# Altium PCB PPG_Board.PcbDoc
Units mm, origin at the board's own origin, x right, y up, seen from the top; angles counter-clockwise.
Board outline 25 x 19 mm, 4 copper layers (Top Layer, Int1 (GND), Int2 (PWR), Bottom Layer), stack 1.334 mm thick; 43 components, 21 nets, 148 pads, 77 vias.
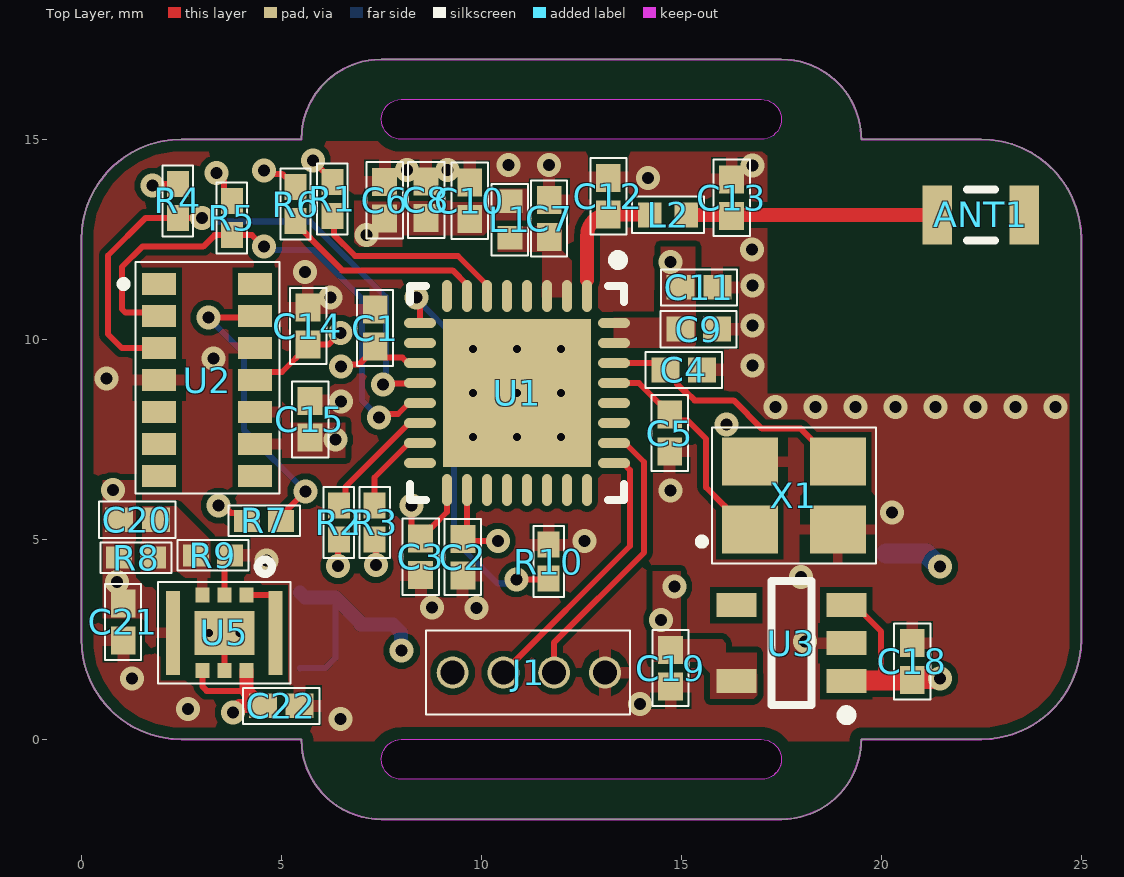
[diagram p0: Top Layer view]
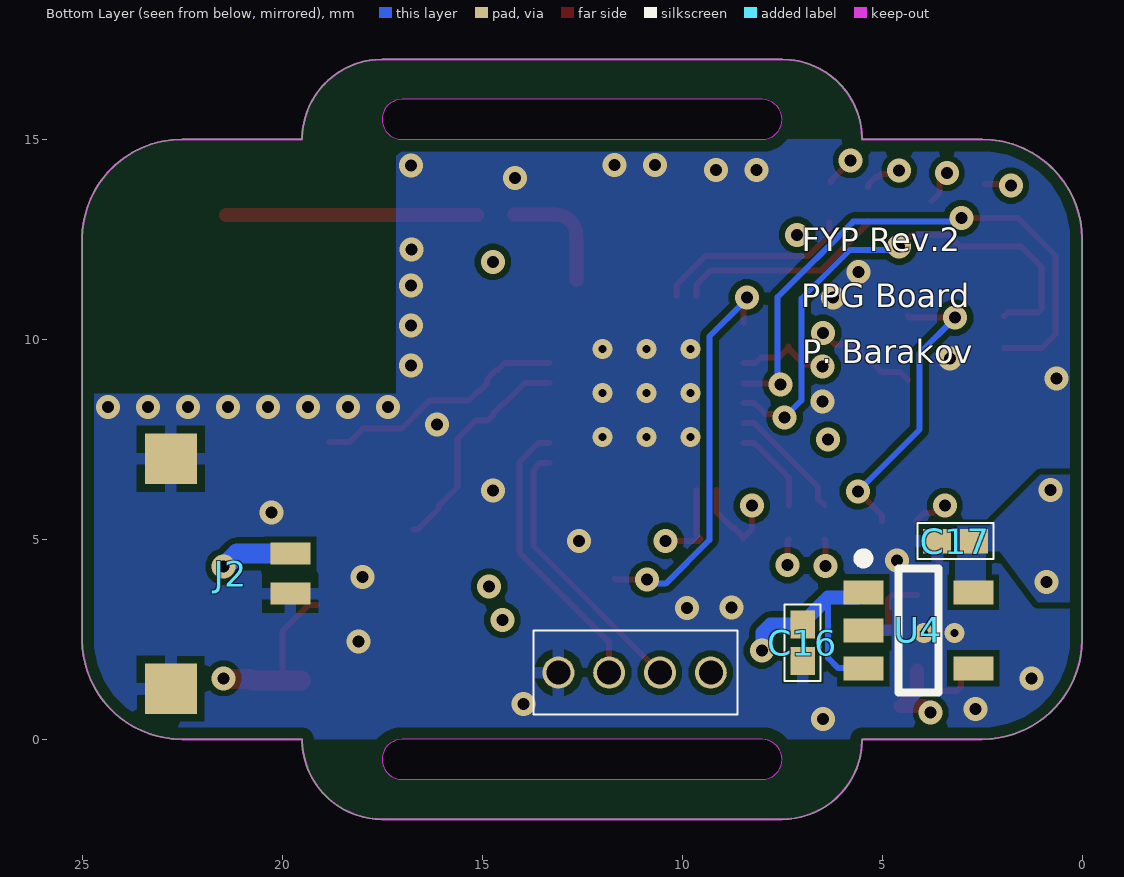
[diagram p1: Bottom Layer view, seen from below]
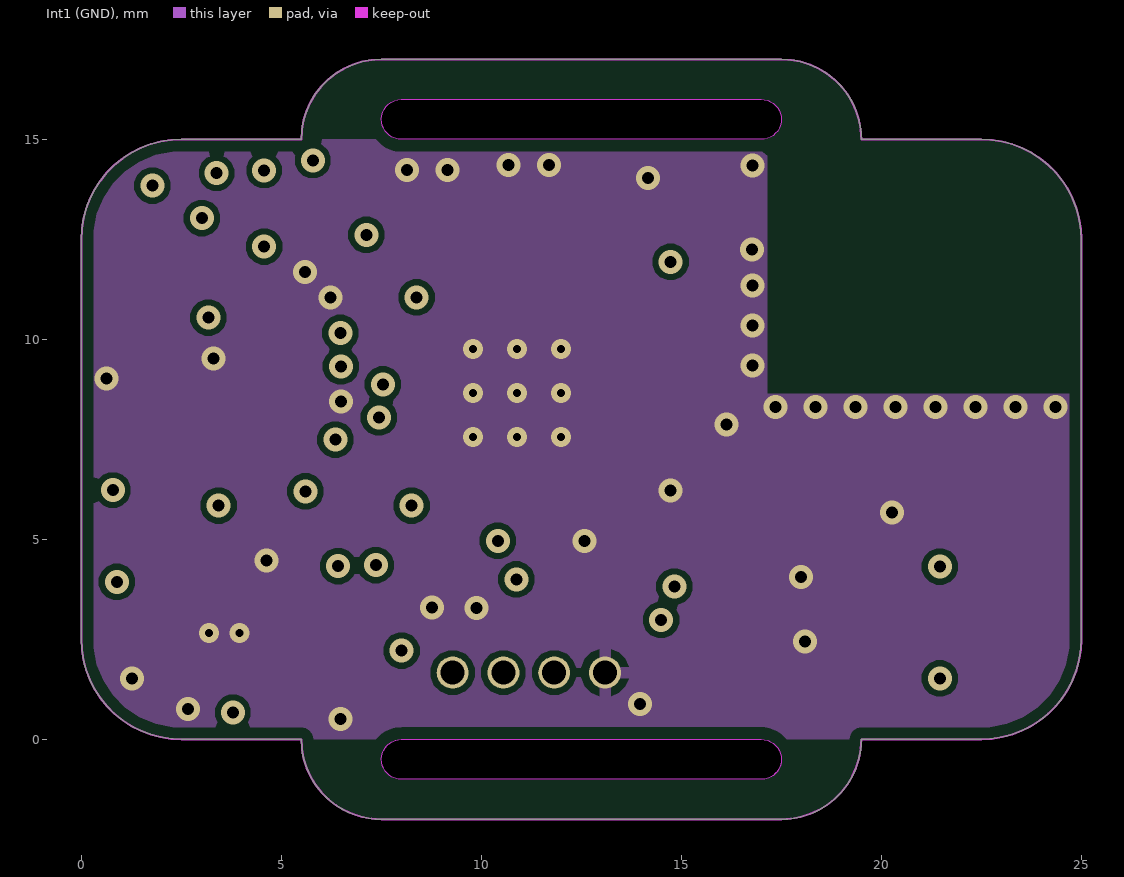
[diagram p2: Int1 (GND)]
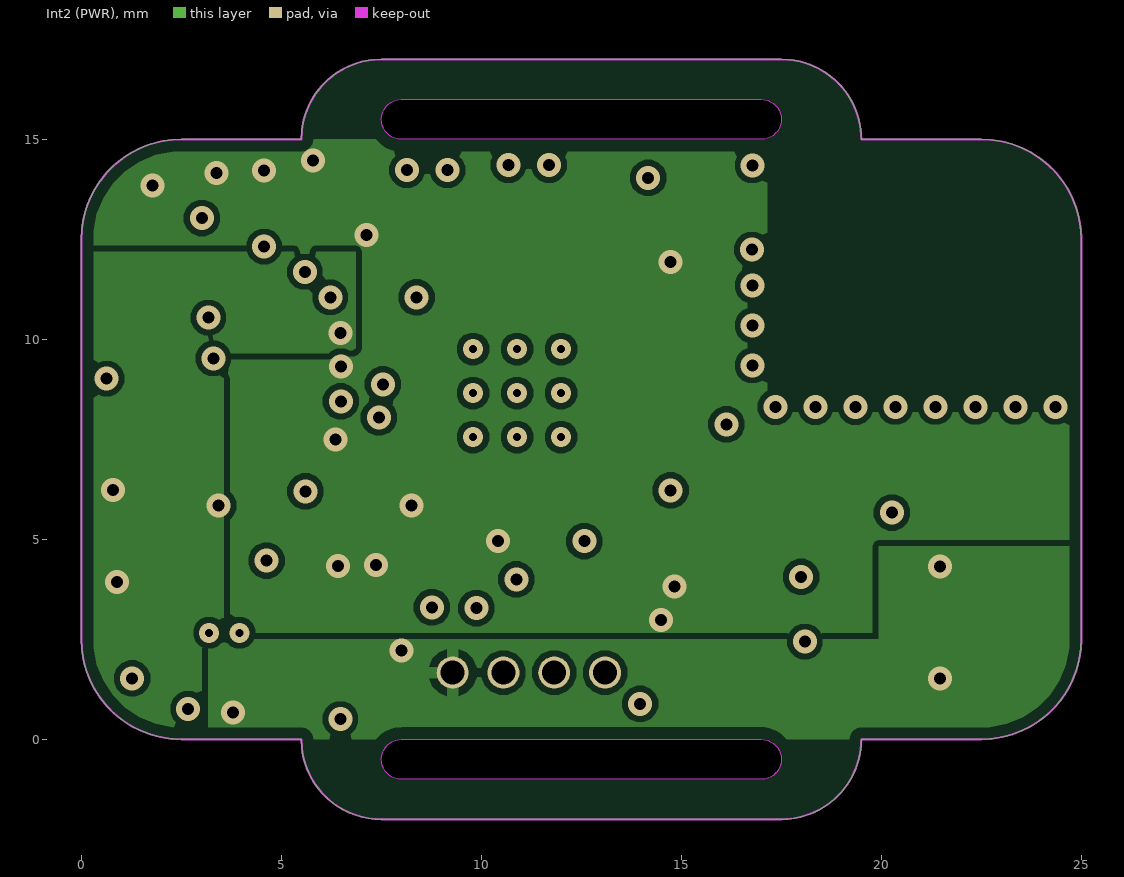
[diagram p3: Int2 (PWR)]
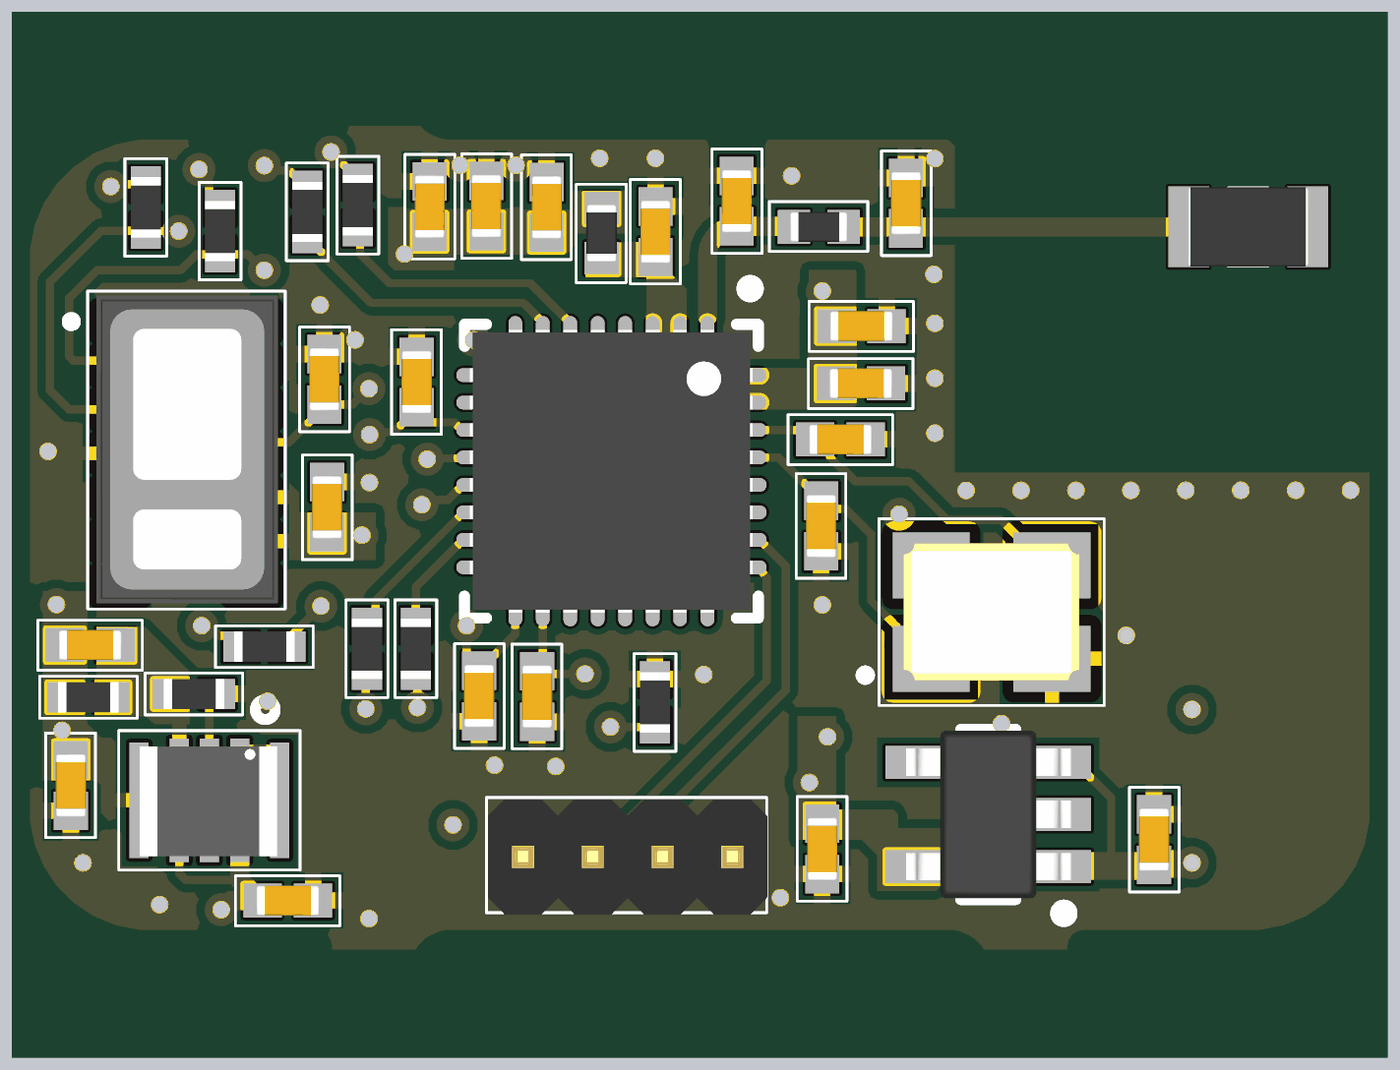
[diagram p4: 3D render of the assembled board from above, using the file's embedded part models]
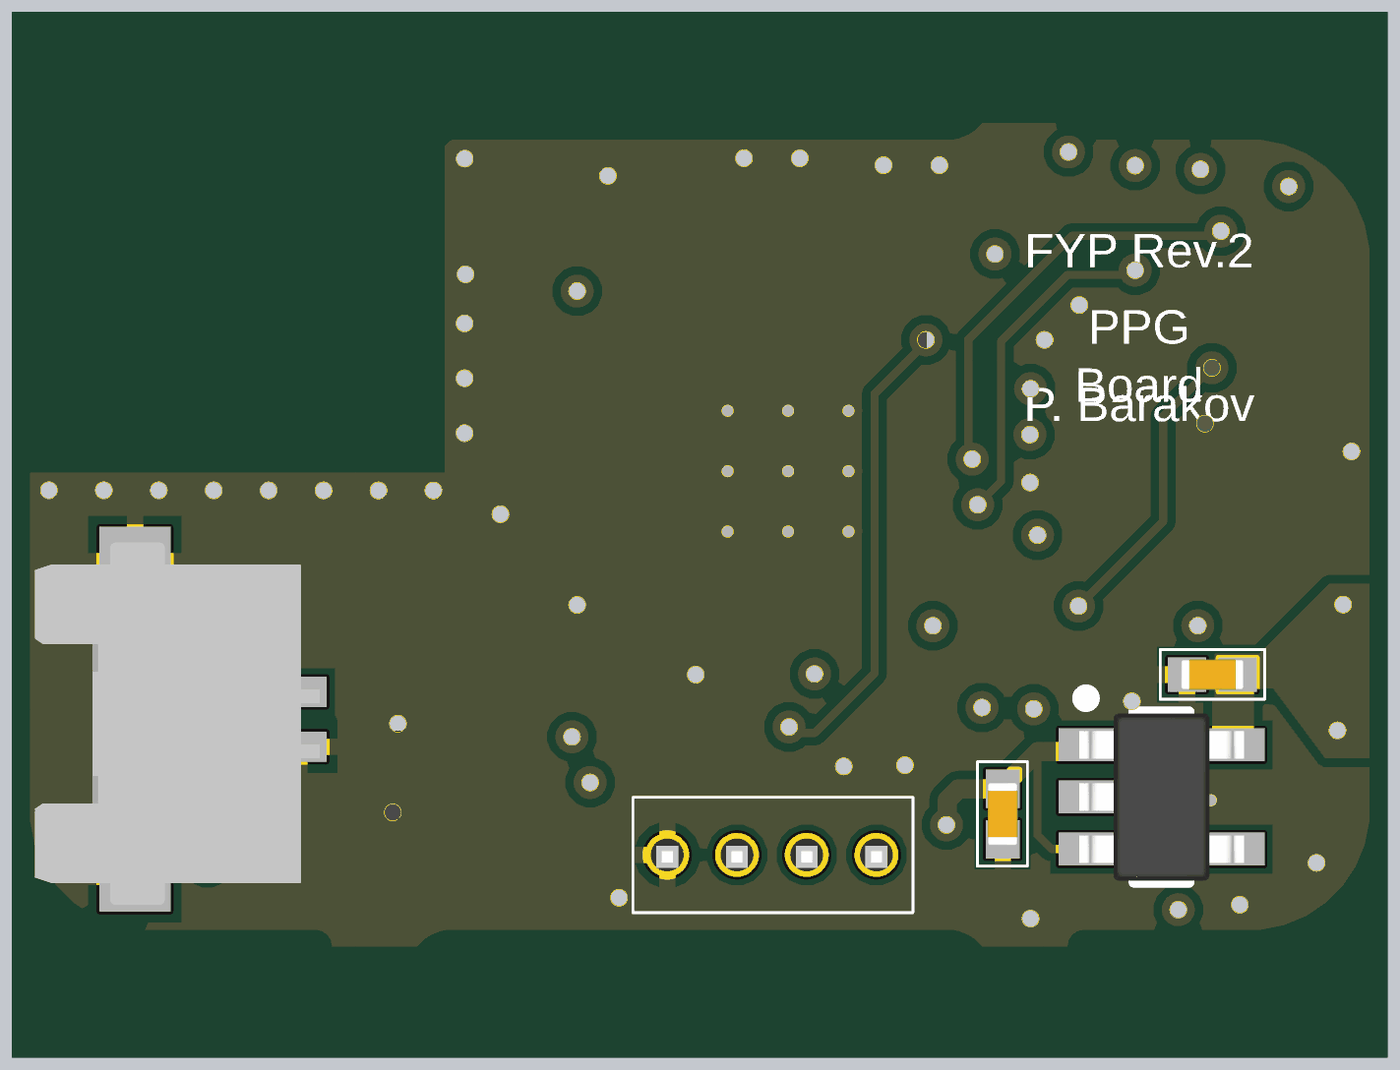
[diagram p5: 3D render of the assembled board from below, using the file's embedded part models]

## Layer stack, top to bottom
Top Solder: solder mask 0.0254, SM-001, Dk 4
Top Layer: signal copper 0.035
Dielectric 1: prepreg 0.1295, PP-017, Dk 4.3
Dielectric 2: prepreg 0.1295, PP-017, Dk 4.3
Int1 (GND): signal copper 0.0175
Dielectric 3: core 0.7112, Core-039, Dk 4.8
Int2 (PWR): signal copper 0.0175
Dielectric 4: prepreg 0.1295, PP-017, Dk 4.3
Dielectric 5: prepreg 0.1295, PP-017, Dk 4.3
Bottom Layer: signal copper 0.035
Bottom Solder: solder mask 0.0254, SM-001, Dk 4

## Board outline
2.5,0 5.5,0 ccw(c7.5,0) 7.5,-2 17.5,-2 ccw(c17.5,0) 19.5,0 22.5,0 ccw(c22.5,2.5) 25,2.5 25,12.5 ccw(c22.5,12.5) 22.5,15 19.5,15 ccw(c17.5,15) 17.5,17 7.5,17 ccw(c7.5,15) 5.5,15 2.5,15 ccw(c2.5,12.5) 0,12.5 0,2.5 ccw(c2.5,2.5)
cut-out: 7.5,15.5 cw(c8,15.5) 8,16 17,16 cw(c17,15.5) 17.5,15.5 cw(c17,15.5) 17,15 8,15 cw(c8,15.5)
cut-out: 7.5,-0.5 cw(c8,-0.5) 8,0 17,0 cw(c17,-0.5) 17.5,-0.5 cw(c17,-0.5) 17,-1 8,-1 cw(c8,-0.5)

## Design rules (kind name [scope] priority, off if disabled: settings)
BoardOutlineClearance BoardOutlineClearance_1 [All] p1: gap=0.3 ignorepadtopadclearanceinfootprint=FALSE
Clearance "Stitching GND" [IsStitchingVia and InNet('GND') vs (IsVia and (Not IsStitchingVia)) Or IsPad] p1: gap=0.1 ignorepadtopadclearanceinfootprint=FALSE
Clearance Clearance_1 [(ExistsOnLayer('Int1 (GND)') Or ExistsOnLayer('Int2 (PWR)')) vs (ExistsOnLayer('Int1 (GND)') Or ExistsOnLayer('Int2 (PWR)'))] p2: gap=0.15 ignorepadtopadclearanceinfootprint=FALSE except(0.2: Arc-Arc Arc-Track Arc-Text Track-Track Track-Text Text-Text; 0.254: Hole-Hole) sourcerule=47 cellrowname=All cellrowtype=0 cellcolname=All cellcoltype=0 innerlayers=TRUE
Clearance Clearance_2 [(ExistsOnLayer('Top Layer') Or ExistsOnLayer('Bottom Layer')) vs (ExistsOnLayer('Top Layer') Or ExistsOnLayer('Bottom Layer'))] p3: gap=0.15 ignorepadtopadclearanceinfootprint=FALSE except(0.2: Arc-Arc Arc-Track Arc-Text Track-Track Track-Text Text-Text; 0.254: Hole-Hole) sourcerule=47 cellrowname=All cellrowtype=0 cellcolname=All cellcoltype=0 outerlayers=TRUE
Clearance [All] p4: gap=0.254 ignorepadtopadclearanceinfootprint=FALSE ismatrix=TRUE
HoleSize None [HasFootprint('QFN*') OR HasFootprint('XCL2*')] p1: absolutevalues=TRUE maxlimit=2.54 minlimit=0 maxpercent=80.000 minpercent=20.000
HoleSize [All] p2: absolutevalues=TRUE maxlimit=6.3 minlimit=0.3 maxpercent=80.000 minpercent=20.000
HoleToHoleClearance [All] p1: gap=0.5 allowstackedmicrovias=TRUE
MinimumSolderMaskSliver MinimumSolderMaskSliver_1 [All] p1: minsoldermaskwidth=0
MinimumSolderMaskSliver [All] p2: minsoldermaskwidth=0.1
PlaneConnect [All] p1: planeconnectstyle=Relief reliefexpansion=0.508 reliefentries=2 reliefconductorwidth=0.254 reliefairgap=0.254
PolygonConnect GND_Via_Connect [IsVia] p1: thpad.connectstyle=Relief thpad.reliefconductorwidth=0.3 thpad.reliefentries=2 thpad.polygonreliefangle="0 Angle" thpad.airgapwidth=0.2 smdpad.connectstyle=Relief smdpad.reliefconductorwidth=0.3 smdpad.reliefentries=2 smdpad.polygonreliefangle="0 Angle" smdpad.airgapwidth=0.2 via.connectstyle=Direct via.reliefconductorwidth=0.254 via.reliefentries=2 via.polygonreliefangle="0 Angle" via.airgapwidth=0.254
PolygonConnect "Direct Connect" [IsNamedPolygon('3.3VPOUR1') OR IsNamedPolygon('3.3V_PINS2_3') OR IsNamedPolygon('3.3V_POUR2') OR IsNamedPolygon('3.3V_POUR3') OR IsNamedPolygon('3.3V_POUR4') OR IsNamedPolygon('FB_POUR') OR IsNamedPolygon('1.8V_BUCK_POUR') OR IsNamedPolygon('1.8V_BOTTOM')] p2: connectstyle=Direct reliefconductorwidth=0.3 reliefentries=4 polygonreliefangle="45 Angle" airgapwidth=0.2
PolygonConnect [All] p3: connectstyle=Relief reliefconductorwidth=0.3 reliefentries=4 polygonreliefangle="90 Angle" airgapwidth=0.2
RoutingVias [All] p1: holewidth=0.3 width=0.6 viastyle="Through Hole" minholewidth=0.3 minwidth=0.6 maxholewidth=0.3 maxwidth=0.6
SilkToSilkClearance [All] p1: silktosilkclearance=0.1
SilkToSolderMaskClearance [IsPad] p1: minsilkscreentomaskgap=0.08 clearancetoexposedcopper=TRUE
SolderMaskExpansion ViaMasl [IsVia] p1: expansion=0.102 istentingtop=TRUE useseparateexpansions=TRUE expansionbottom=0.102 istentingbottom=TRUE
SolderMaskExpansion [All] p2: expansion=0.05 istentingtop=FALSE
SupplyNets "Schematic Supply Nets_3" [InNet('+VBAT')] p1: voltage=0.000
SupplyNets "Schematic Supply Nets_2" [InNet('GND')] p2: voltage=0.000
SupplyNets "Schematic Supply Nets_1" [InNet('+1.8V')] p3: voltage=0.000
SupplyNets "Schematic Supply Nets" [InNet('+3.3V')] p4: voltage=0.000
UnRoutedNet [All] p1: checkbadconnections=TRUE
Width MaxMinWidth_1 [All] p1: maxlimit=0.7 minlimit=0.1 preferedwidth=0.15 minimp=50.000000 maximp=50.000000 favimp=50.000000
23 further rules are at their usual default settings.

## Components (designator, comment, footprint, x,y, rotation, side; value= is the part's Value field where it differs from the comment)
ANT1 "2.4GHZ_ANT_50_OHM" Chip2PinSM127P600-8N 22.488,13.109 r0 top
C1 "C_0402_0.1uF" C_0402 7.346,10.281 r90 top
C2 "C_0402_0.1uF" C_0402 9.54,4.554 r90 top
C3 "C_0402_0.1uF" C_0402 8.482,4.564 r270 top
C4 "C_0402_10pF" C_0402 15.061,9.236 r180 top
C5 "C_0402_10pF" C_0402 14.712,7.658 r90 top
C6 "C_0402_10uF" C_0402 7.581,13.477 r270 top
C7 "C_0402_0.1uF" C_0402 11.696,13.019 r90 top
C8 "C_0402_1uF" C_0402 8.615,13.487 r270 top
C9 "C_0402_10nF" C_0402 15.434,10.256 r180 top
C10 "C_0402_0.1uF" C_0402 9.712,13.464 r90 top
C11 "C_0402_0.1uF" C_0402 15.442,11.3 r180 top
C12 "C_0402_3.3pF" C_0402 13.173,13.577 r270 top
C13 "C_0402_3.3pF" C_0402 16.256,13.54 r270 top
C14 "C_0402_1uF" C_0402 5.665,10.332 r270 top
C15 "C_0402_10uF" C_0402 5.715,8.001 r270 top
C16 "C_0402_1uF" C_0402 6.985,2.413 r90 bottom
C17 "C_0402_1uF" C_0402 3.167,4.952 r180 bottom
C18 "C_0402_1uF" C_0402 20.771,1.948 r270 top
C19 "C_0402_1uF" C_0402 14.732,1.778 r90 top
C20 "C_0402_150pF" C_0402 1.401,5.492 r180 top
C21 "C_0402_10uF" C_0402 1.049,2.934 r90 top
C22 "C_0402_4.7uF" C_0402 4.999,0.838 r180 top
J1 "4PIN_HEADER_1.27" 4PIN_HEADER_1.27-Footprint-1 13.092,1.669 r180 top
J2 "503763-0291" "Molex 503763-0291" 20.443,4.64 r90 bottom
L1 "L_0402_2.2nH" L_0402 10.714,12.993 r270 top
L2 "L_0402_2.2nH" L_0402 14.667,13.109 r180 top
R1 "R_0402_4k7" R_0402 6.275,13.505 r270 top
R2 "R_0402_4k7" R_0402 6.441,5.424 r90 top
R3 "R_0402_4k7" R_0402 7.33,5.424 r90 top
R4 "R_0402_4k7" R_0402 2.413,13.462 r270 top
R5 "R_0402_4k7" R_0402 3.766,13.031 r270 top
R6 "R_0402_4k7" R_0402 5.354,13.38 r270 top
R7 "R_0402_4k7" R_0402 4.572,5.461 r180 top
R8 "R_0402_300k" R_0402 1.368,4.54 r0 top
R9 "R_0402_240k" R_0402 3.29,4.601 r0 top
R10 "R_0402_4k7" R_0402 11.684,4.445 r90 top
U1 "ESP32-C3" QFN127P600-8N 10.892,8.658 r270 top
U2 "MAX30102" MAX30102-Footprint-1 1.946,11.383 r0 top
U3 "TLV75533PDBVR" SOT95P280X145-5N 17.754,2.405 r180 top
U4 "TPS784-Q1" SOT95P280X145-5N 4.092,2.723 r180 bottom
U5 "XCL206F083" XCL206F083-Footprint-1 3.573,2.663 r180 top
X1 "40MHz_OSC" 40MHz_OSC-Footprint-1 16.713,6.942 r0 top

## Footprints (in the part's own frame and the unit in brackets; to place one, negate y for a bottom-side part, rotate by r counter-clockwise, add the part's x,y. Pads: shape width x height; smd on the part's side, far side on the other; paste and mask are expansions set on the pad)
4PIN_HEADER_1.27-Footprint-1 [mm]
  round 0.8 hole 0.6: 1(0,0) 2(1.27,0) 3(2.54,0) 4(3.81,0)
  silkscreen extent -0.63,-1.05 4.47,1.05, body extent -0.64,-1.02 4.44,1.08, height 4
40MHz_OSC-Footprint-1 [mm]
  rect 1.4x1.2 smd mask+0.2: 1(0,-1.7) 2(2.2,-1.7) 3(2.2,0) 4(0,0)
  silkscreen extent -1.25,-2.55 3.15,0.85, body extent -0.5,-2.1 2.7,0.4, height 0.6
C_0402 [mm]
  rect 0.7x0.62 smd: 1(-0.46,0) 2(0.46,0)
  silkscreen extent -0.95,-0.45 0.95,0.46, body extent -0.58,-0.28 0.58,0.28, height 0.55
Chip2PinSM127P600-8N [mm]
  rect 0.74x1.47 smd: 1(-1.085,0) 2(1.085,0)
  silkscreen extent -0.35,-0.64 0.35,0.64, body extent -1.1,-0.72 1.1,0.72, height 1.2
L_0402 [mm]
  rect 0.59x0.62 smd: 1(-0.455,0) 2(0.455,0)
  silkscreen extent -0.89,-0.46 0.9,0.45, body extent -0.53,-0.28 0.53,0.28, height 0.55
MAX30102-Footprint-1 [mm]
  rect 0.85x0.55 smd mask+0.15: 1(0,0) 2(0,-0.8) 3(0,-1.6) 4(0,-2.4) 5(0,-3.2) 6(0,-4) 7(0,-4.8) 8(2.4,-4.8) 9(2.4,-4) 10(2.4,-3.2) 11(2.4,-2.4) 12(2.4,-1.6) 13(2.4,-0.8) 14(2.4,0)
  silkscreen extent -0.94,-5.23 3.01,0.56, body extent -0.43,-5.13 2.87,0.47, height 1.65
"Molex 503763-0291" [mm] "Picolock 1.0mm pitch 2-pin"
  rect 0.55x1 smd: 1(0,-0.65) 2(-1,-0.65)
  rect 1.26x1.3 smd: 3(2.375,2.34) 4(-3.375,2.34)
  body extent -3.88,-1.03 2.72,4.16, height 1.47
QFN127P600-8N [mm]
  oval 0.8x0.25 smd: 1(-2.425,1.75) 2(-2.425,1.25) 3(-2.425,0.75) 4(-2.425,0.25) 5(-2.425,-0.25) 6(-2.425,-0.75) 7(-2.425,-1.25) 8(-2.425,-1.75) 17(2.425,-1.75) 18(2.425,-1.25) 19(2.425,-0.75) 20(2.425,-0.25) 21(2.425,0.25) 22(2.425,0.75) 23(2.425,1.25) 24(2.425,1.75)
  oval 0.25x0.8 smd: 9(-1.75,-2.425) 10(-1.25,-2.425) 11(-0.75,-2.425) 12(-0.25,-2.425) 13(0.25,-2.425) 14(0.75,-2.425) 15(1.25,-2.425) 16(1.75,-2.425) 25(1.75,2.425) 26(1.25,2.425) 27(0.75,2.425) 28(0.25,2.425) 29(-0.25,2.425) 30(-0.75,2.425) 31(-1.25,2.425) 32(-1.75,2.425)
  rect 3.7x3.7 smd: 33(0,0)
  silkscreen extent -3.45,-2.68 2.68,2.67, body extent -2.58,-2.58 2.58,2.58, height 0.9
R_0402 [mm]
  rect 0.65x0.55 smd: 1(-0.425,0) 2(0.425,0)
  silkscreen extent -0.89,-0.38 0.89,0.38, body extent -0.55,-0.28 0.55,0.28, height 0.4
SOT95P280X145-5N [mm] "SOT23, 5-Leads, Body 2.90x2.80mm, Pitch 0.95mm, IPC Medium Density"
  rect 1x0.6 smd: 1(-1.375,0.95) 2(-1.375,0) 3(-1.375,-0.95) 4(1.375,-0.95) 5(1.375,0.95)
  silkscreen extent -1.5,-1.55 0.5,1.92, body extent -1.5,-1.53 1.5,1.53, height 1.45
XCL206F083-Footprint-1 [mm]
  rect 0.35x0.375 smd mask+0.07: 1(-0.55,-0.94) 2(0,-0.94) 3(0.55,-0.94) 4(0.55,0.94) 5(0,0.94) 6(-0.55,0.94)
  rect 0.35x2.1 smd mask+0.07: 7(-1.28,0) 8(1.28,0)
  rect 1.5x1.1 smd mask+0.07: 9(0,0)
  silkscreen extent -1.65,-1.83 1.65,1.27, body extent -1.23,-0.98 1.27,1.02, height 1.04

## Part data
ANT1: library part CMP-00009-6, "2.4GHz Chip Antenna 50 Ohm Impedance ANT2012LL00R2400A", Distributor=Mouser, Order Code=603-ANT2012LL00R2400
C1 C2 C3 C7 C10 C11: library part CMP-00055-1, JLC Part Number=C1525
C4 C5: library part CMP-00051-1, JLC Part Number=C32949
C6 C15 C21: library part CMP-00052-1, JLC Part Number=C15525
C8 C14 C16 C17 C18 C19: library part CMP-00053-1, JLC Part Number=C52923
C9: library part CMP-00054-1, JLC Part Number=C15195
C12 C13: library part CMP-00056-1, JLC Part Number=C326841
C20: library part CMP-00060-1, JLC Part Number=C363531
C22: library part CMP-00058-1, JLC Part Number=C23733
J1: library part CMP-00049-2, Distributor=Mouser, Order Code=855-M50-3530442
J2: library part CMP-007-000000-2, "Molex 503763-0291", Design Item ID=503763-0291, Distributor=Mouser, Order Code=538-503763-0291
L1 L2: library part CMP-00057-1, JLC Part Number=C92035
R1 R2 R3 R4 R5 R6 R7 R10: library part CMP-00050-1, JLC Part Number=C25900
R8: library part CMP-00061-1, JLC Part Number=C100363
R9: library part CMP-00062-1, JLC Part Number=C429390
U1: library part CMP-00008-4, "33 pin ESP32_C3 Microcontroller", JLC Part Number=C2858491
U2: library part CMP-00048-2, "Biometric Sensors Integrated Optical Sensor", JLC Part Number=C6454833, Distributor=Mouser, Order Code=700-MAX30102EFD+T
U3: library part CMP-00019-2, "LDO Voltage Regulators 500-mA high-PSRR low-IQ low-dropout voltage regulator with enable 5-SOT-23 -40 to 125", JLC Part Number=C404027
U4: library part CMP-00023-2, "LDO Voltage Regulators Automotive, 300-mA, low-IQ, high-PSRR, LDO voltage regulator with high accuracy and enable 5-SOT-23 -40 to 150", JLC Part Number=C2877783, Distributor=Mouser, Order Code=595-TPS78418QDBVRQ1
U5: library part CMP-00059-2, "Switching Voltage Regulators 600mA Inductor Built-in PWM Step-Down microDCDC Converter", JLC Part Number=C2891283
X1: library part CMP-00029-2, "40 MHZ Oscillator, 10pF load capacitance", JLC Part Number=C426988

## Via types
v1: diameter 0.6, hole 0.3, Top Layer to Bottom Layer, tented both sides, 66 vias
v2: diameter 0.5, hole 0.2, Top Layer to Bottom Layer, tented both sides, 11 vias

## Nets (pads, with @x,y where several pads share a name; then routed paths per layer and width w, separated by ;. In a path a pad name is that pad's centre, name@x,y a point inside that pad or via, vN(x,y) a via of type N, cw(c..) or ccw(c..) an arc to the next point about the centre after c; other vN are vias at no path point)
+1.8V: C14.2 C17.2 C20.2 C21.2 R7.2 R8.1 U2.11 U4.5 U5.8 | length 3.5
  Top Layer w0.15: v1(3.432,5.844) 3.554,5.844 3.737,5.661 3.947,5.661 R7.2 ; U2.11 4.546,9.183 5.016,9.183 5.665,9.832 C14.2 6.181,9.872 6.469,10.16 v1(6.477,10.16)
  other v1: 0.889,3.937 0.787,6.229
+3.3V: C1.1 C2.2 C3.1 C6.2 C8.2 C9.2 C10.1 C11.2 C15.2 C19.2 L1.1 R1.1 R2.1 R3.1 R4.1 R5.1 R6.1 U1.11 U1.17 U1.18 U1.31 U1.32 U2.9 U2.10 U3.5 | length 11.5
  Top Layer w0.15: v1(1.778,13.843) 1.822,13.887 R4.1 ; v1(3.382,14.154) 3.429,14.107 3.429,14.097 3.566,13.96 3.566,13.656 R5.1 ; v1(4.572,14.224) 4.658,14.138 5.022,14.138 5.104,14.055 5.154,14.055 5.354,13.855 R6.1 ; v1(5.786,14.473) 5.786,14.469 6.275,13.98 R1.1 ; v1(6.42,4.329) 6.42,4.978 R2.1 ; v1(6.489,9.325) 6.53,9.367 6.931,9.367 C1.1@7.346,9.781 ; R3.1 7.361,4.968 v1(7.361,4.353) ; C1.1 C1.1@7.346,9.781 ; v1(8.255,5.842) 8.255,5.251 C3.1 8.482,5.064 8.717,5.299 8.757,5.299 9.142,5.684 U1.17 ; U1.11 8.165,9.408 8.027,9.546 7.581,9.546 C1.1@7.346,9.781 ; U1.18 9.642,5.116 C2.2 9.589,4.964 v1(10.411,4.964)
  other v1: 14.495,2.987 14.827,3.819 6.35,7.493 14.732,11.938 7.125,12.613
+VBAT: C16.2 C18.2 C22.2 J1.4 J2.1 U3.1 U3.3 U4.1 U4.3 U5.4 U5.6 | length 15.1
  Top Layer w0.15: U5.4 3.023,1.323 3.133,1.213 4.123,1.213 ; U3.3@19.129,3.364 19.329,3.364 19.992,2.701 19.992,1.466
  Top Layer w0.35: v1(3.787,0.671) 3.954,0.838 C22.2@4.499,0.838 ; U5.6 4.123,1.213 C22.2@4.499,0.838 ; C22.2 C22.2@4.499,0.838
  Top Layer w0.5: U3.1@19.526,1.466 19.992,1.466 20.749,1.466 20.789,1.506 21.445,1.506 v1(21.463,1.524)
  Bottom Layer w0.15: U4.3 5.473,1.778 6.096,1.778 6.35,2.032 6.35,3.548
  Bottom Layer w0.35: U4.1 5.592,3.548 6.35,3.548 6.985,2.913 C16.2 7.787,2.873 7.992,2.668 7.992,2.231 v1(8.008,2.215)
  Bottom Layer w0.5: J2.1@20.121,4.64 21.124,4.64 21.446,4.318 v1(21.463,4.318)
ANT: ANT1.1 C13.2 L2.1 | length 6.5
  Top Layer w0.35: L2.1 ANT1.1 ; C13.2@16.266,13.109 C13.2@16.485,13.109
ESP_BOOT: R3.2 U1.15 | length 2.2
  Top Layer w0.15: R3.2 7.33,6.546 8.192,7.408 U1.15
ESP_EN: R6.2 U1.7 | length 5.3
  Top Layer w0.15: R6.2 5.354,12.905 5.732,12.528 5.732,12.511 6.519,11.724 9.281,11.724 9.642,11.363 U1.7
GND: C1.2 C2.1 C3.2 C4.1 C5.1 C6.1 C7.2 C8.1 C9.1 C10.2 C11.1 C12.1 C13.1 C14.1 C15.1 C16.1 C17.1 C18.1 C19.1 C21.1 C22.1 J1.1 J2.2 J2.3 J2.4 R9.2 R10.2 U1.33 U2.4 U2.12 U3.2 U4.2 U5.2 U5.5 U5.9 X1.2 X1.4 | length 2
  Top Layer w0.15: U5.5 U5.9 ; U5.2@3.573,3.616 3.573,4.459 R9.2
  other v1: 6.477,0.508 2.667,0.762 13.97,0.889 1.27,1.524 18.088,2.443 9.878,3.28 8.763,3.302 17.995,4.059 4.632,4.467 12.573,4.953 20.265,5.666 14.732,6.223 16.129,7.874 17.35,8.307 18.35,8.308 19.35,8.308 20.35,8.309 21.35,8.309 22.35,8.31 23.35,8.31 24.35,8.31 6.486,8.452 0.635,9.017 16.782,9.351 3.302,9.525 16.782,10.351 6.223,11.049 16.781,11.351 5.588,11.684 16.764,12.243 14.173,14.038 8.138,14.23 9.154,14.23 10.678,14.357 11.694,14.357 16.78,14.351
  other v2: 3.192,2.663 3.954,2.663 9.792,7.558 10.892,7.558 11.992,7.558 9.792,8.658 10.892,8.658 11.992,8.658 9.792,9.758 10.892,9.758 11.992,9.758
I2C_SCL: R5.2 U1.13 U2.2 | length 13.4
  Top Layer w0.15: U2.2 1.861,10.668 1.104,10.668 1.016,10.756 1.016,11.811 1.524,12.319 3.044,12.319 3.331,12.606 4.266,12.606 4.553,12.319 v1(4.572,12.319) ; v1(7.44,8.047) 7.526,8.133 7.917,8.133 8.192,8.408 U1.13
  Bottom Layer w0.15: v1(4.572,12.319) 4.658,12.233 5.801,12.233 7.014,11.02 7.014,8.473 v1(7.44,8.047)
I2C_SDA: R4.2 U1.12 U2.3 | length 14.7
  Top Layer w0.15: U2.3 1.012,9.783 0.666,10.129 0.666,12.096 1.607,13.037 R4.2 2.42,13.03 v1(3.013,13.03) ; v1(7.539,8.877) 7.554,8.892 8.451,8.892 U1.12
  Bottom Layer w0.15: v1(3.013,13.03) 3.099,12.944 5.725,12.944 7.612,11.057 7.612,8.95 v1(7.539,8.877)
LED1: R10.1 U1.9 | length 9.9
  Top Layer w0.15: v1(8.382,11.049) 8.467,10.964 U1.9 ; v1(10.874,3.999) 11.663,3.999 R10.1
  Bottom Layer w0.15: v1@8.463,10.925 9.317,10.071 9.317,4.984 10.411,3.89 10.643,3.89 10.666,3.913 10.917,3.913 v1@10.941,3.89
MCU_ANT: C12.2 L2.2 U1.1 | length 3
  Top Layer w0.35: U1.1@12.642,11.479 12.642,12.586 cw(c13.173,12.586) C12.2 L2.2@14.204,13.117
NetC4_2: C4.2 U1.30 X1.3 | length 6.4
  Top Layer w0.15: U1.30 14.429,9.408 C4.2 14.641,9.236 14.876,9.001 14.876,8.902 15.086,8.693 15.115,8.693 15.333,8.475 16.307,8.475 17.015,7.767 17.988,7.767 18.326,7.43 X1.3@18.812,7.43
NetC5_2: C5.2 U1.29 X1.1 | length 5.7
  Top Layer w0.15: U1.29 13.938,8.908 14.453,8.393 14.477,8.393 14.712,8.158 C5.2 14.859,7.97 15.159,7.97 15.621,7.508 15.621,6.297 16.088,5.83 16.088,5.767 16.613,5.242 X1.1
NetC7_1: C7.1 L1.2 U1.2 U1.3
NetC20_1: C20.1 R8.2 R9.1 U5.3
NetR1_2: R1.2 U1.6 | length 4.9
  Top Layer w0.15: R1.2@6.315,12.923 6.315,12.616 6.848,12.082 9.418,12.082 10.142,11.358 U1.6
NetR2_2: R2.2 U1.14 | length 3.1
  Top Layer w0.15: R2.2 6.599,6.007 6.599,6.31 8.197,7.908 U1.14
NetR7_1: R7.1 U2.13 | length 7.5
  Top Layer w0.15: v1(3.175,10.541) 4.305,10.541 U2.13 ; R7.1 4.997,5.594 v1(5.603,6.201)
  Bottom Layer w0.15: v1(3.175,10.541) 4.064,9.652 4.064,7.74 v1(5.603,6.201)
NetU5_1: U5.1 U5.7 | length 1.6
  Top Layer w0.15: U5.1 4.753,3.603 4.853,3.503 U5.7
USB_N: J1.3 U1.25 | length 6.9
  Top Layer w0.15: J1.3 13.716,4.832 13.716,6.731 13.642,6.805 13.642,6.831 13.565,6.908 U1.25
USB_P: J1.2 U1.26 | length 7.1
  Top Layer w0.15: J1.2 11.822,2.424 14.066,4.667 14.066,6.934 13.592,7.408 U1.26
pads on no net: ANT1.2 U1.4 U1.5 U1.8 U1.10 U1.16 U1.19 U1.20 U1.21 U1.22 U1.23 U1.24 U1.27 U1.28 U2.1 U2.5 U2.6 U2.7 U2.8 U2.14 U3.4 U4.4

## Polygon pours and split planes (outlines as drawn)
GND on Int1 (GND) "NONET_L01_P-001" (solid, pour order 1): 0,0 25,0 25,15 0,15
+1.8V on Bottom Layer "1.8V_BOTTOM" (solid, pour order 4): 1.113,3.429 2.058,4.699 2.413,4.693 2.413,3.429 3.175,3.429 3.175,4.123 3.175,5.336 2.316,5.336 1.042,6.611 0.306,6.611 0.306,3.429
GND on Bottom Layer "NONET_L01_P-001" (solid, pour order 16): 0,0 25,0 25,15 0,15
+3.3V on Top Layer "3.3V_POUR4" (solid, pour order 9): 16.896,1.014 15.729,1.014 15.729,1.656 15.446,1.939 14.281,1.939 14.281,4.201 14.986,4.201 14.986,2.5 16.029,2.5 16.11,2.406 16.11,2.159 16.885,2.159
+1.8V on Top Layer "1.8V_BUCK_POUR" (solid, pour order 7): 2.54,3.81 2.567,3.783 2.567,1.463 1.596,2.434 1.596,2.937 1.509,3.024 0.539,3.024 0.539,5.931 0.539,6.477 1.356,6.477 1.356,4.047 1.596,3.807 1.626,3.807
NetC20_1 on Top Layer "FB_POUR" (solid, pour order 8): 1.397,5.842 1.397,4.191 2.413,4.191 3.015,3.589 3.221,3.589 3.221,4.995 2.391,5.825 1.414,5.825
+3.3V on Top Layer "3.3V_POUR4" (solid, pour order 11): 3.771,8.558 3.771,7.028 3.775,7.024 3.792,7.041 6.604,7.041 6.604,7.911 5.205,7.911 5.205,8.257 4.904,8.558
+3.3V on Top Layer "3.3V_POUR3" (solid, pour order 12): 13.311,10.539 13.311,9.784 15.367,9.779 15.348,12.319 14.486,12.319 14.475,10.539
+3.3V on Top Layer "3.3V_POUR2" (solid, pour order 13): 6.827,13.468 6.827,12.241 8.026,12.23 8.026,12.599 10.063,12.599 10.424,12.96 11.186,12.96 11.186,13.74 11.156,13.769 10.043,13.769 10.043,13.468 9.916,13.468 7.249,13.468
NetC7_1 on Top Layer "3.3V_PINS2_3" (solid, pour order 14): 11.516,11.049 12.261,11.049 12.261,11.97 12.007,12.224 12.007,12.832 10.414,12.832 10.414,12.192 11.525,12.192 11.525,11.609
GND on Top Layer "" (solid, pour order 15): -0.015,-0.052 25.017,-0.052 25.017,14.948 -0.015,14.948
+1.8V on Int2 (PWR) "NONET_L01_P-001" (solid, pour order 6): 0,0 3.556,0 3.556,9.652 6.858,9.652 6.858,12.192 0,12.192
+VBAT on Int2 (PWR) "NONET_L01_P-001" (solid, pour order 5): 25,0 25.019,0.019 25.019,4.826 19.939,4.826 19.939,2.5 3.175,2.5 3.175,0
+3.3V on Int2 (PWR) "NONET_L01_P-001" (solid, pour order 10): 0,0 25,0 25,15 0,15

## Keep-outs
Keep-Out Layer:
  pour cut-out: 7.5,-0.5 cw(c8,-0.5) 8,0 17,0 cw(c17,-0.5) 17.5,-0.5 cw(c17,-0.5) 17,-1 8,-1 cw(c8,-0.5)
  lines w0.05: 0,2.5 ccw(c2.5,2.5) 2.5,0 5.5,0 ccw(c7.5,0) 7.5,-2 17.5,-2 ccw(c17.5,0) 19.5,0 22.5,0 ccw(c22.5,2.5) 25,2.5 25,12.5 ccw(c22.5,12.5) 22.5,15 19.5,15 ccw(c17.5,15) 17.5,17 7.5,17 ccw(c7.5,15) 5.5,15 2.5,15 ccw(c2.5,12.5) 0,12.5 0,2.5

## Other copper
Top Layer:
  pour cut-out: 17.145,8.636 17.145,14.986 25.019,14.986 25.019,8.636
Int1 (GND):
  pour cut-out: 17.145,8.636 17.145,14.986 25.019,14.986 25.019,8.636
Int2 (PWR):
  pour cut-out: 17.145,8.636 17.145,14.986 25.019,14.986 25.019,8.636
Bottom Layer:
  pour cut-out: 17.145,8.636 17.145,14.986 25.019,14.986 25.019,8.636

## Silkscreen, mask and mechanical layers (free items; w line width, h text height)
Bottom Overlay:
  text "FYP Rev.2" at 7.014,12 h1
  text "PPG Board" at 7.017,10.6 h1
  text "P. Barakov" at 6.994,9.2 h1
Mechanical 1:
  lines w0.05: 7.5,-0.5 cw(c8,-0.5) 8,0 17,0 cw(c17,-0.5) 17.5,-0.5 ; 7.5,-0.5 ccw(c8,-0.5) 8,-1 17,-1 ccw(c17,-0.5) 17.5,-0.5 ; 7.5,-0.5 7.5,-0.5 ; 7.5,15.5 cw(c8,15.5) 8,16 17,16 cw(c17,15.5) 17.5,15.5 ; 7.5,15.5 ccw(c8,15.5) 8,15 17,15 ccw(c17,15.5) 17.5,15.5 ; 7.5,15.5 7.5,15.5 ; 17.5,-0.5 17.5,-0.5 ; 17.5,15.5 17.5,15.5 ; 0,2.5 ccw(c2.5,2.5) 2.5,0 5.5,0 ccw(c7.5,0) 7.5,-2 17.5,-2 ccw(c17.5,0) 19.5,0 22.5,0 ccw(c22.5,2.5) 25,2.5 25,12.5 ccw(c22.5,12.5) 22.5,15 19.5,15 ccw(c17.5,15) 17.5,17 7.5,17 ccw(c7.5,15) 5.5,15 2.5,15 ccw(c2.5,12.5) 0,12.5 0,2.5

## Dimensions
22.5,15 to 22.5,0 on Mechanical 1
0,2.5 to 25,2.5 on Mechanical 1